# Altium PCB ESP32sample.PcbDoc
Units mil, origin at the board's own origin, x right, y up, seen from the top; angles counter-clockwise.
Board outline 1240 x 1335 mil, 4 copper layers (Top Layer, Signal2, Gnd3, Bottom Layer), stack 42.312 mil thick; 68 components, 69 nets, 286 pads, 9 vias.
Unrouted connection lines stored in the file: 175.
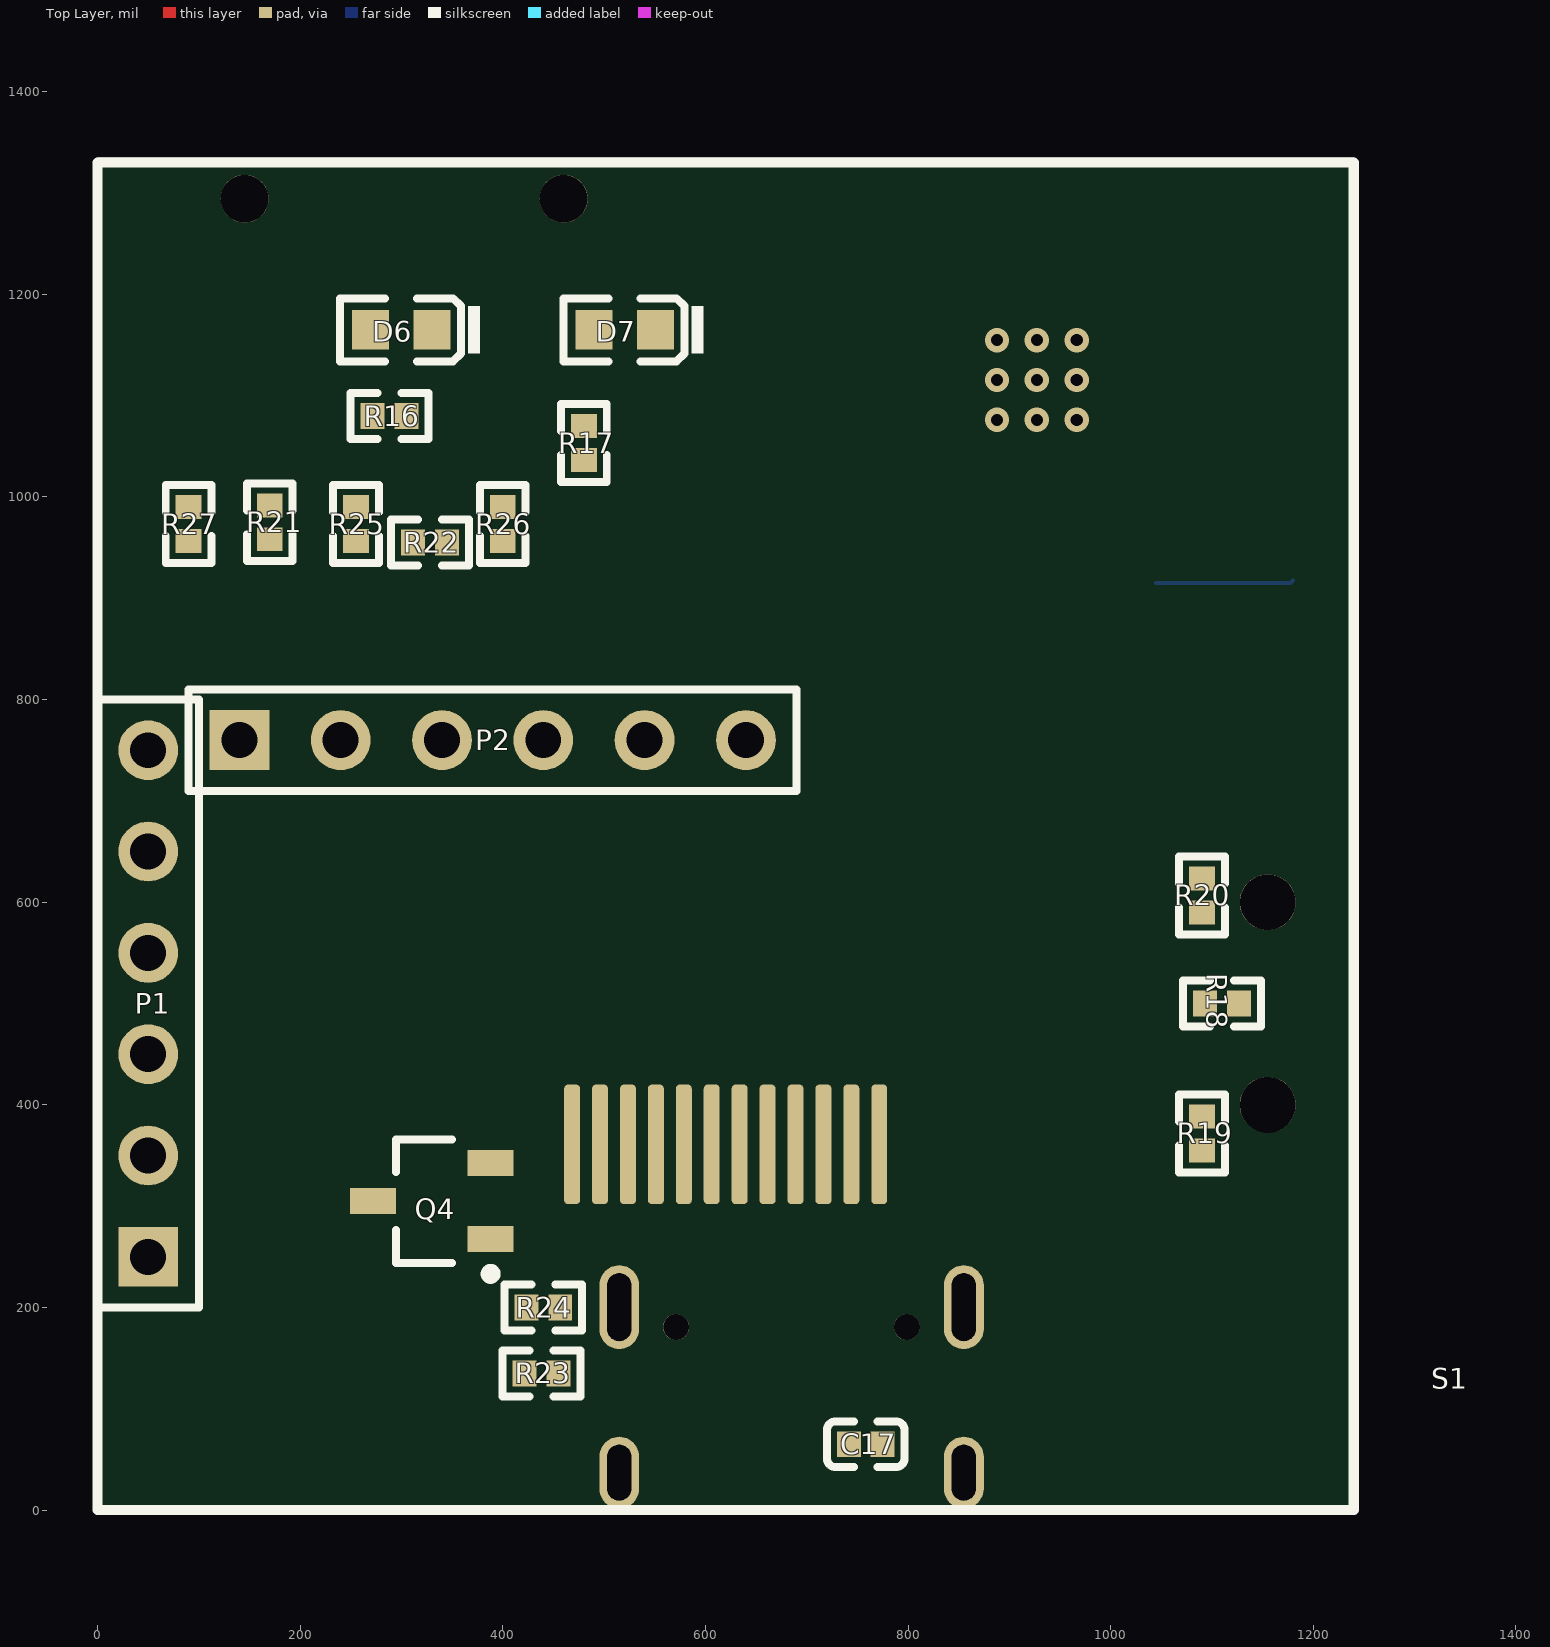
[diagram p0: Top Layer view]
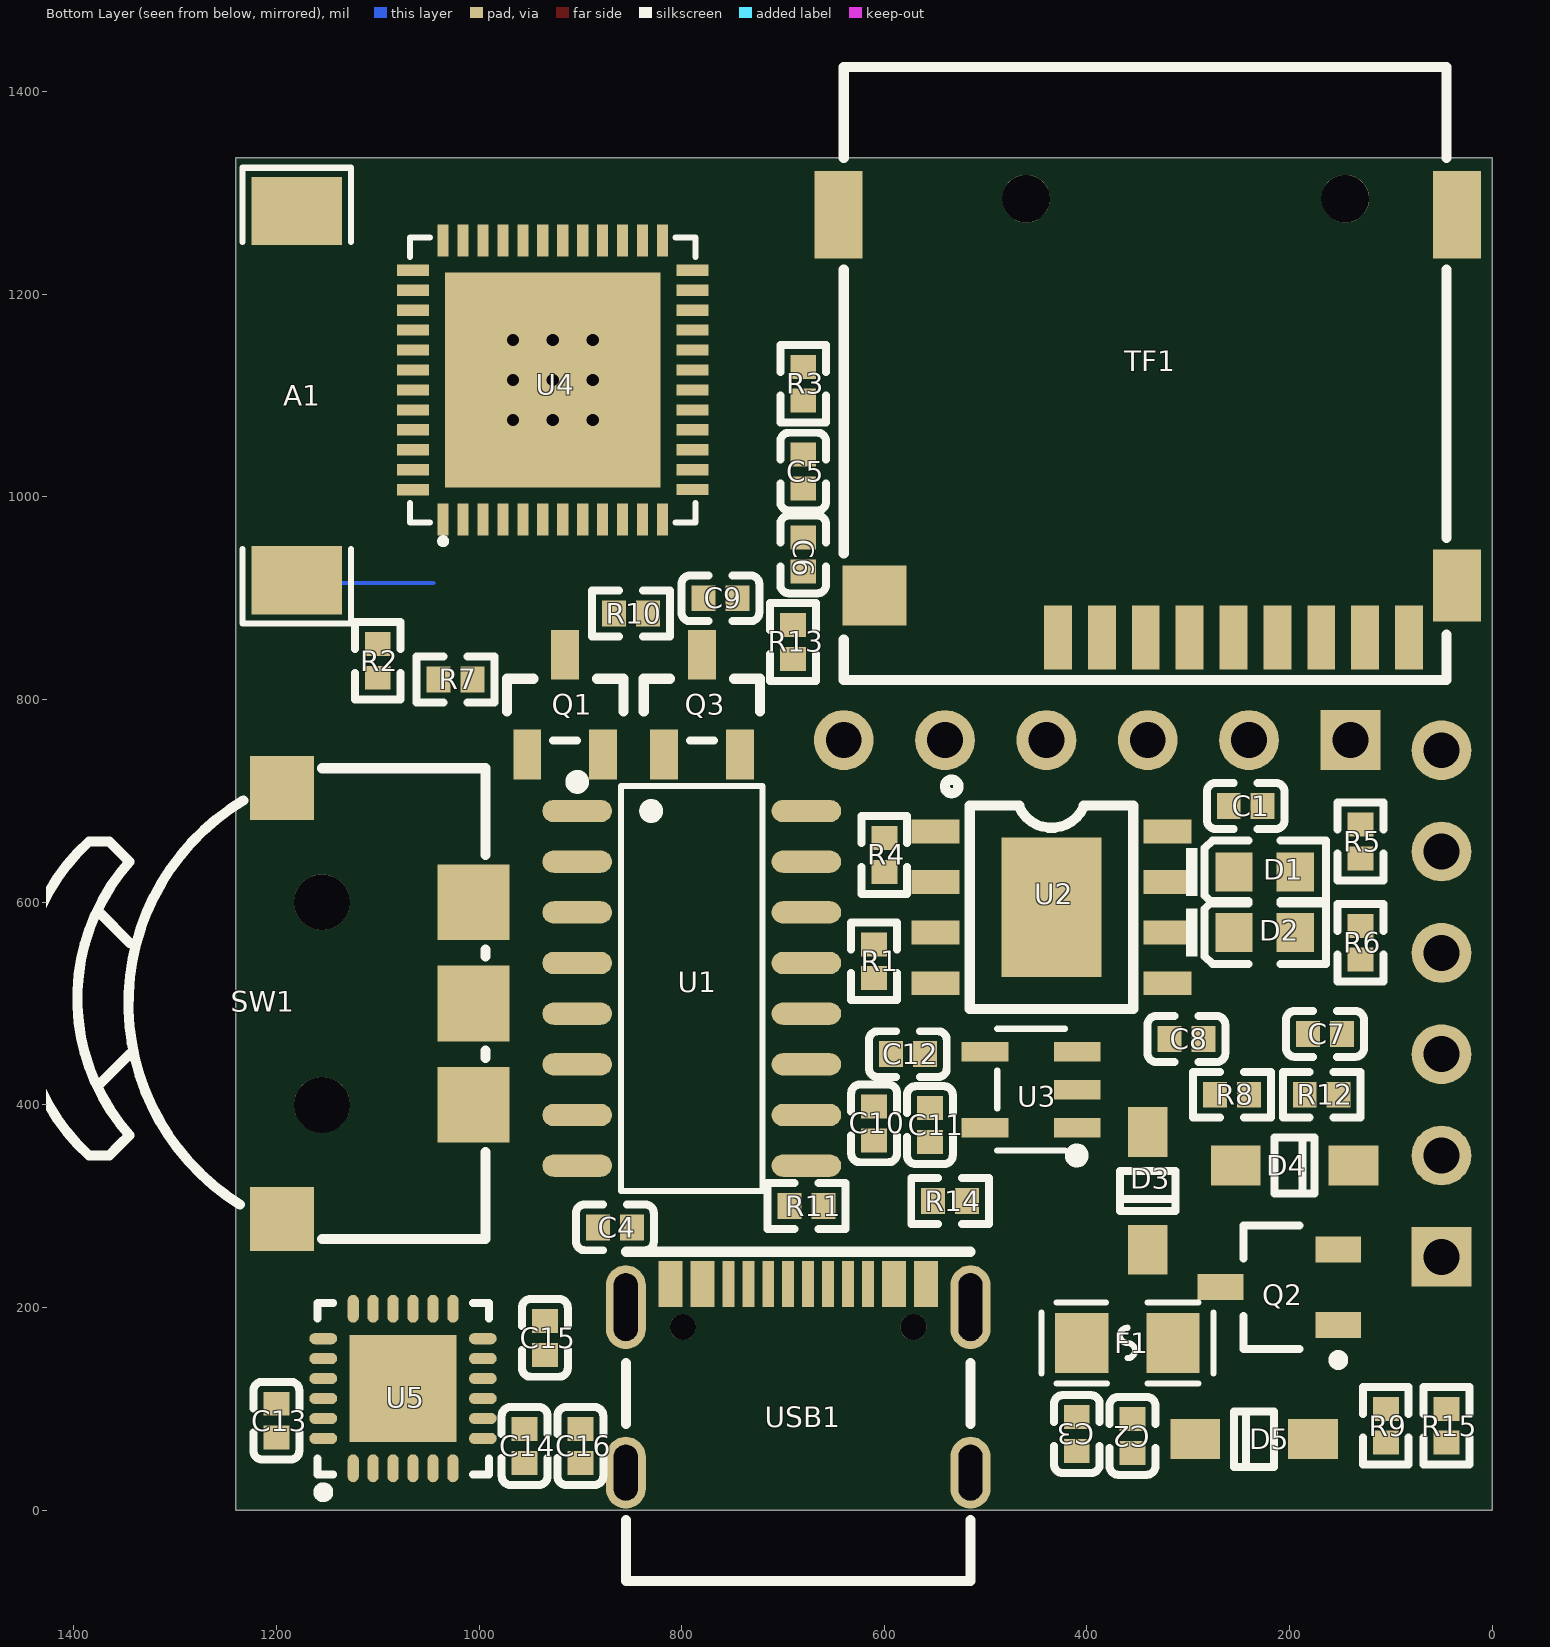
[diagram p1: Bottom Layer view, seen from below]

## Layer stack, top to bottom
Top Solder: solder mask 0.4, Solder Resist, Dk 3.5
Top Layer: signal copper 1.4
Dielectric 2: prepreg 12.252, PP-006, Dk 4.1
Signal2: signal copper 1.378
Dielectric 1: dielectric 12.252, FR-4, Dk 4.2
Gnd3: signal copper 1.378
Dielectric 3: prepreg 12.252, PP-006, Dk 4.1
Bottom Layer: signal copper 1.4
Bottom Solder: solder mask 0.4, Solder Resist, Dk 3.5

## Board outline
0,0 1240,0 1240,1335 0,1335

## Design rules (kind name [scope] priority, off if disabled: settings)
Clearance [All] p1: gap=4 ignorepadtopadclearanceinfootprint=FALSE
ComponentClearance [All] p1: gap=0 collisioncheckmode=3 verticalgap=0 showdistances=FALSE
DiffPairsRouting [All] p1: maxlimit=9 minlimit=9 mostfreqgap=9 toplayer_minwidth=4 toplayer_maxwidth=4 toplayer_prefwidth=4 midlayer1_minwidth=4 midlayer1_maxwidth=4 midlayer1_prefwidth=4 midlayer2_minwidth=4 midlayer2_maxwidth=4 midlayer2_prefwidth=4 bottomlayer_minwidth=4 bottomlayer_maxwidth=4 bottomlayer_prefwidth=4 maxuncoupledlength=500
FanoutControl Fanout_BGA [All] p1: bgadir=Out bgaviamode=Centered fanoutstyle=Auto fanoutdirection=Alternating viagrid=1 // Fanout_BGA (Default Rule)
HoleSize [All] p1: absolutevalues=TRUE maxlimit=10000 minlimit=8 maxpercent=80.000 minpercent=20.000
MinimumSolderMaskSliver [All] p1 off: minsoldermaskwidth=2
PlaneClearance [All] p1: clearance=8
PlaneConnect [All] p1: planeconnectstyle=Direct reliefexpansion=20 reliefentries=4 reliefconductorwidth=10 reliefairgap=10
PolygonConnect [All] p1: connectstyle=Direct reliefconductorwidth=10 reliefentries=4 polygonreliefangle="90 Angle" airgapwidth=10
RoutingVias [All] p1: holewidth=8 width=16 viastyle="Through Hole" minholewidth=6 minwidth=12 maxholewidth=28 maxwidth=50
SilkToSilkClearance [All] p1: silktosilkclearance=0
SilkToSolderMaskClearance [IsPad] p1: minsilkscreentomaskgap=0 clearancetoexposedcopper=TRUE
SolderMaskExpansion [All] p1: expansion=3 istentingtop=FALSE
Width [All] p1: maxlimit=10000 minlimit=4 preferedwidth=4
21 further rules are at their usual default settings.

## Components (designator, comment, footprint, x,y, rotation, side; value= is the part's Value field where it differs from the comment)
A1 "AN9520-245" ANT-SMD_L9.5-W2.1 1180,1100 r270 bottom
C1 "10uF (106) 20% 6.3V" 0402_C 243.27,695 r180 bottom
C2 "10uF (106) 20% 6.3V" 0402_C 355,73.27 r90 bottom
C3 "100nF (104) 10% 16V" 0402_C 410,75 r90 bottom
C4 "100nF (104) 10% 16V" 0402_C 865.85,279.12 r180 bottom
C5 "10uF (106) 20% 6.3V" 0402_C 680,1025 r90 bottom
C6 "100nF (104) 10% 16V" 0402_C 680,943.27 r270 bottom
C7 "10uF (106) 20% 6.3V" 0402_C 165,470 r180 bottom
C8 "10uF (106) 20% 6.3V" 0402_C 301.73,465 r180 bottom
C9 "1.0uF (105) 10% 25V" 0402_C 761.73,900 r0 bottom
C10 "100nF (104) 10% 16V" 0402_C 610,381.73 r270 bottom
C11 "10uF (106) 20% 6.3V" 0402_C 555,380 r270 bottom
C12 "10nF (103) 10% 50V" 0402_C 576.73,450 r180 bottom
C13 "2.2nF (222) 10% 50V" 0402_C 1200,88.27 r270 bottom
C14 "2.2nF (222) 10% 50V" 0402_C 955,63.27 r90 bottom
C15 "100nF (104) 10% 16V" 0402_C 935,170 r270 bottom
C16 "10nF (103) 10% 50V" 0402_C 900,63.27 r90 bottom
C17 "100nF (104) 10% 16V" 0402_C 758.27,65 r180 top
D1 "红灯 0603" 0603_LED_S1 224.69,630 r180 bottom
D2 "绿灯 0603" 0603_LED_S1 224.69,570 r180 bottom
D3 "1N5819W" SOD-123 340,315 r90 bottom
D4 "1N5819W" SOD-123 195,340 r0 bottom
D5 "1N5819W" SOD-123 235,70 r180 bottom
D6 "白灯 0603" 0603_LED_S1 299.69,1165 r180 top
D7 "白灯 0603" 0603_LED_S1 520.32,1165 r180 top
F1 "ASMD0805-050" ASMD0805 360,165 r180 bottom
P1 "Header 6" HDR1X6 50,250 r90 top
P2 "Header 6" HDR1X6 140,760 r0 top
Q1 "SS8050 Y1" SOT-23(SOT-23-3) 915,795 r270 bottom
Q2 "AO3401A P道沟 X13A15 SOT-23" SOT-23-3L 210,220 r180 bottom
Q3 "SS8050 Y1" SOT-23(SOT-23-3) 780,795 r270 bottom
Q4 "AO3400A N道沟 X0YV1T SOT-23" SOT-23-3L 330,305 r0 top
R1 "1Ω (1R00) ±1%" 0402_R 610,541.73 r270 bottom
R2 "200Ω (2000) ±1%" 0402_R 1100,838.27 r270 bottom
R3 "0Ω (0R0) ±1%" 0402_R 680,1111.73 r90 bottom
R4 "1.2KΩ (1201) ±1%" 0402_R 600,646.73 r270 bottom
R5 "1KΩ (1001) ±1%" 0402_R 130,660 r270 bottom
R6 "1KΩ (1001) ±1%" 0402_R 130,560 r90 bottom
R7 "12KΩ (1202) ±1%" 0402_R 1023.27,820 r180 bottom
R8 "100KΩ (1003) ±1%" 0402_R 256.73,410 r180 bottom
R9 "1KΩ (1001) ±1%" 0402_R 105,83.27 r270 bottom
R10 "10KΩ (1002) ±1%" 0402_R 850,885 r180 bottom
R11 "5.1KΩ (5101) ±1%" 0402_R 676.73,300 r180 bottom
R12 "100KΩ (1003) ±1%" 0402_R 168.27,410 r0 bottom
R13 "12KΩ (1202) ±1%" 0402_R 690,856.73 r90 bottom
R14 "5.1KΩ (5101) ±1%" 0402_R 535,305 r0 bottom
R15 "100KΩ (1003) ±1%" 0402_R 45,83.27 r90 bottom
R16 "1KΩ (1001) ±1%" 0402_R 288.27,1080 r180 top
R17 "1KΩ (1001) ±1%" 0402_R 480,1053.27 r90 top
R18 "10KΩ (1002) ±1%" 0402_R 1110,500 r0 top
R19 "10KΩ (1002) ±1%" 0402_R 1090,371.73 r90 top
R20 "10KΩ (1002) ±1%" 0402_R 1090,606.73 r90 top
R21 "10KΩ (1002) ±1%" 0402_R 170,975 r90 top
R22 "10KΩ (1002) ±1%" 0402_R 328.27,955 r180 top
R23 "10Ω (10R0) ±1%" 0402_R 438.27,135 r0 top
R24 "10KΩ (1002) ±1%" 0402_R 440,200 r180 top
R25 "10KΩ (1002) ±1%" 0402_R 255,973.27 r90 top
R26 "10KΩ (1002) ±1%" 0402_R 400,973.27 r90 top
R27 "10KΩ (1002) ±1%" 0402_R 90,973.27 r90 top
S1 "LCD-240x240" LCD-240x240-FlUSH-154 620,670 r0 top locked
SW1 "K1-1502SA-02" KEY-SMD_K1-1502SA-02 1099.88,500 r90 bottom
TF1 "TF" TF-SMD_THD2528 340,1070 r0 bottom
U1 "CH340" SOP-16_L10.0 790,515 r270 bottom
U2 "TP4056_C725790" ESOP-8_TP4056 435,595 r270 bottom
U3 "LP2992 3V3" SOT-23-5_L3.0-W1.7-P0.95-LS2.8-BL 455,415 r90 bottom
U4 "ESP32_SIP" QFN-48_7X7 927.2,1115.47 r180 bottom
U5 "MPU-6050" QFN-24_4x4x05P 1075,120 r180 bottom
USB1 "TYPE-C16PIN" TYPE-C-SMD 685,130 r180 bottom

## Footprints (in the part's own frame and the unit in brackets; to place one, negate y for a bottom-side part, rotate by r counter-clockwise, add the part's x,y. Pads: shape width x height; smd on the part's side, far side on the other; paste and mask are expansions set on the pad)
0402_C [mm]
  rect 0.6x0.65 smd mask+0.051: 1(-0.425,0) 2(0.425,0)
  silkscreen extent -0.97,-0.58 0.97,0.58, body extent -0.48,-0.3 0.52,0.3, height 0.2
0402_R [mm]
  rect 0.6x0.65 smd mask+0.051: 1(-0.425,0) 2(0.425,0)
  silkscreen extent -0.97,-0.58 0.97,0.58, body extent -0.57,-0.27 0.58,0.28, height 0.41
0603_LED_S1 [mm]
  rect 0.93x0.98 smd: A(0.77,0) K(-0.77,0)
  silkscreen extent -1.97,-0.79 1.54,0.79, body extent -0.8,-0.4 0.8,0.4, height 0.6
ANT-SMD_L9.5-W2.1 [mm] "陶瓷天线pcb"
  rect 1.71x2.268 smd: 1(-4.63,0) 2(4.63,0)
  silkscreen extent -5.71,-1.36 5.71,1.36, body extent -4.75,-1.05 4.75,1.05
ASMD0805 [mm]
  rect 1.335x1.5 smd: 1(-1.142,0) 2(1.142,0)
  silkscreen extent -2.16,-1.02 2.16,1.02, body extent -1.03,-0.69 1.07,0.71, height 0.83
ESOP-8_TP4056 [mm]
  rect 0.6x1.2 smd: 1(-1.905,-2.908) 2(-0.635,-2.908) 3(0.635,-2.908) 4(1.905,-2.908) 5(1.905,2.908) 6(0.635,2.908) 7(-0.635,2.908) 8(-1.905,2.908)
  rect 3.5x2.5 smd: 9(0,0)
  silkscreen extent -3.2,-2.67 2.55,2.05, body extent -2.48,-2.96 2.52,3.24, height 1.76
HDR1X6 [mm] "Connector; Header; 6 Position"
  rect 1.5x1.5 hole 0.9: 1(0,0)
  round 1.5 hole 0.9: 2(2.54,0) 3(5.08,0) 4(7.62,0) 5(10.16,0) 6(12.7,0)
  silkscreen extent -1.27,-1.27 13.97,1.27
KEY-SMD_K1-1502SA-02 [mm]
  rect 1.9x1.8 smd: 1(-2.54,-2.4) 2(2.54,-2.4) T(0,-2.4)
  rect 1.6x1.6 smd: 3(-5.4,2.4) C(5.4,2.4)
  round 1.4 hole 1.4 unplated: ""(-2.54,1.4) ""(2.54,1.4)
  silkscreen extent -5.9,-2.7 5.9,8.97, body extent -7.21,-2.88 7.29,9.56, height 2.54
LCD-240x240-FlUSH-154 [mm]
  rrect50% 0.4x3 smd: 1(3.851,-7.85) 2(3.151,-7.85) 3(2.451,-7.85) 4(1.751,-7.85) 5(1.051,-7.85) 6(0.351,-7.85) 7(-0.349,-7.85) 8(-1.049,-7.85) 9(-1.749,-7.85) 10(-2.449,-7.85) 11(-3.149,-7.85) 12(-3.849,-7.85)
  silkscreen extent -15.75,-17.02 15.75,16.76, body extent -15.7,-17.02 15.7,16.76
QFN-24_4x4x05P [mm]
  rect 2.68x2.68 smd mask+0.051: 0(0,0)
  oval 0.28x0.7 smd mask+0.051: 1(-1.25,-2) 2(-0.75,-2) 3(-0.25,-2) 4(0.25,-2) 5(0.75,-2) 6(1.25,-2) 13(1.25,2) 14(0.75,2) 15(0.25,2) 16(-0.25,2) 17(-0.75,2) 18(-1.25,2)
  oval 0.7x0.28 smd mask+0.051: 7(2,-1.25) 8(2,-0.75) 9(2,-0.25) 10(2,0.25) 11(2,0.75) 12(2,1.25) 19(-2,1.25) 20(-2,0.75) 21(-2,0.25) 22(-2,-0.25) 23(-2,-0.75) 24(-2,-1.25)
  silkscreen extent -2.15,-2.72 2.15,2.15
QFN-48_7X7 [mm]
  rect 0.28x0.8 smd: 1(-2.75,-3.5) 2(-2.25,-3.5) 3(-1.75,-3.5) 4(-1.25,-3.5) 5(-0.75,-3.5) 6(-0.25,-3.5) 7(0.25,-3.5) 8(0.75,-3.5) 9(1.25,-3.5) 10(1.75,-3.5) 11(2.25,-3.5) 12(2.75,-3.5) 25(2.75,3.5) 26(2.25,3.5) 27(1.75,3.5) 28(1.25,3.5) 29(0.75,3.5) 30(0.25,3.5) 31(-0.25,3.5) 32(-0.75,3.5) 33(-1.25,3.5) 34(-1.75,3.5) 35(-2.25,3.5) 36(-2.75,3.5)
  rect 0.8x0.28 smd: 13(3.5,-2.75) 14(3.5,-2.25) 15(3.5,-1.75) 16(3.5,-1.25) 17(3.5,-0.75) 18(3.5,-0.25) 19(3.5,0.25) 20(3.5,0.75) 21(3.5,1.25) 22(3.5,1.75) 23(3.5,2.25) 24(3.5,2.75) 37(-3.5,2.75) 38(-3.5,2.25) 39(-3.5,1.75) 40(-3.5,1.25) 41(-3.5,0.75) 42(-3.5,0.25) 43(-3.5,-0.25) 44(-3.5,-0.75) 45(-3.5,-1.25) 46(-3.5,-1.75) 47(-3.5,-2.25) 48(-3.5,-2.75)
  rect 5.4x5.4 smd: 49(0,0)
  silkscreen extent -3.58,-4.11 3.58,3.58, body extent -3.47,-3.5 3.53,3.5, height 0.91
SOD-123 [mm]
  rect 1.25x1 smd: 1(1.475,0) 2(-1.475,0)
  silkscreen extent -0.5,-0.7 0.5,0.7, body extent -1.85,-0.77 1.85,0.78, height 1.35
SOP-16_L10.0 [mil]
  oval 22x68.7 smd mask+2: 1(-175,-113.1) 2(-125,-113.1) 3(-75,-113.1) 4(-25,-113.1) 5(25,-113.1) 6(75,-113.1) 7(125,-113.1) 8(175,-113.1) 9(175,113.1) 10(125,113.1) 11(75,113.1) 12(25,113.1) 13(-25,113.1) 14(-75,113.1) 15(-125,113.1) 16(-175,113.1)
  silkscreen extent -210,-119 200,70, body extent -196,-124 198,117, height 69
SOT-23(SOT-23-3) [mm]
  rect 1.25x0.7 smd: 1(1.25,-0.95) 2(1.25,0.95) 3(-1.25,0)
  silkscreen extent -0.65,-1.46 0.9,1.46, body extent -1.5,-1.5 1.5,1.5, height 1.3
SOT-23-3L [mm] "http://www.aosmd.com/res/packaging_information/SOT-23-3L.pdf"
  rect 1.15x0.65 smd: 1(1.475,-0.95) 2(1.475,0.95) 3(-1.475,0)
  silkscreen extent -0.9,-1.95 1.6,1.55, body extent -0.9,-1.55 0.9,1.55, height 1.25
SOT-23-5_L3.0-W1.7-P0.95-LS2.8-BL [mm]
  rect 0.49x1.157 smd: 1(-0.95,-1.154) 2(0,-1.154) 3(0.95,-1.154)
  rect 0.49x1.175 smd: 4(0.95,1.154) 5(-0.95,1.154)
  silkscreen extent -1.8,-1.29 1.53,0.85
TF-SMD_THD2528 [mm]
  rect 0.7x1.6 smd: 1(2.25,5.3) 2(1.15,5.3) 3(0.05,5.3) 4(-1.05,5.3) 5(-2.15,5.3) 6(-3.25,5.3) 7(-4.35,5.3) 8(-5.45,5.3) 9(-6.55,5.3)
  rect 1.2x1.8 smd: 10(-7.75,4)
  rect 1.2x2.2 smd: 11(-7.75,-5.3) 12(7.75,-5.3)
  rect 1.6x1.5 smd: 13(6.85,4.25)
  round 1.2 hole 1.2 unplated: ""(-4.95,-5.7) ""(3.05,-5.7)
  silkscreen extent -7.49,-9 7.62,6.36, body extent -8.15,-9.77 8,5.43, height 2.04
TYPE-C-SMD [mm]
  oval 1x2.1 hole 0.6 slot 1.7 at 90 deg: 1(-4.32,1.787) 2(4.32,1.787)
  oval 1x1.8 hole 0.6 slot 1.4 at 90 deg: 3(-4.32,-2.362) 4(4.32,-2.362)
  rect 0.6x1.15 smd: A1B12(-3.2,2.362) A4B9(-2.4,2.362) B1A12(3.2,2.362) B4A9(2.4,2.362)
  rect 0.3x1.15 smd: A5(-1.25,2.362) A6(-0.25,2.362) A7(0.25,2.362) A8(-1.75,2.362) B5(1.75,2.362) B6(0.75,2.362) B7(-0.75,2.362) B8(1.25,2.362)
  round 0.65 hole 0.65 unplated: ""(-2.89,1.288) ""(2.89,1.288)
  silkscreen extent -4.32,-5.08 4.32,3.17, body extent -4.7,-5.22 4.24,2.68, height 1.61

## Part data
A1: "陶瓷wifi/bt天线", BOM_JLCPCB Part Class="Extended Part", BOM_Manufacturer=Rainsun, BOM_Manufacturer Part=AN9520-245, BOM_Supplier=LCSC, BOM_Supplier Part=C99665, spicePre=L, spiceSymbolName=AN9520-245
C1 C2 C5 C7 C8 C11: library part "0402 10uF (106) 20% 6.3V", "贴片电容", Package=0402, SuppliersPartNumber=C15525, ComponentLink1Description=供应商链接, ComponentLink1URL=http://www.szlcsc.com/product/details_16204.html, Supplier=LC
C3 C4 C6 C10 C15 C17: library part "0402 100nF (104) 10% 16V", "贴片电容", Package=0402, SuppliersPartNumber=C1525, ComponentLink1Description=供应商链接, ComponentLink1URL=http://www.szlcsc.com/product/details_1877.html, Supplier=LC
C9: library part "0402 1.0uF (105) 10% 25V", "贴片电容", Package=0402, SuppliersPartNumber=C52923, ComponentLink1Description=供应商链接, ComponentLink1URL=http://www.szlcsc.com/product/details_53938.html, Supplier=LC
C12 C16: library part "0402 10nF (103) 10% 50V", "贴片电容", Package=0402, SuppliersPartNumber=C15195, ComponentLink1Description=供应商链接, ComponentLink1URL=http://www.szlcsc.com/product/details_15869.html, Supplier=LC
C13 C14: library part "0402 2.2nF (222) 10% 50V", "贴片电容", Package=0402, SuppliersPartNumber=C1531, ComponentLink1Description=供应商链接, ComponentLink1URL=http://www.szlcsc.com/product/details_1883.html, Supplier=LC
D1: library part "0603 红灯", "发光二极管", Package=0603, SuppliersPartNumber=C2286, ComponentLink1Description=供应商链接, ComponentLink1URL=http://www.szlcsc.com/product/details_2659.html, Supplier=LC
D2: library part "0603 绿灯", "发光二极管", Package=0603, SuppliersPartNumber=C72043, ComponentLink1Description=供应商链接, ComponentLink1URL=http://www.szlcsc.com/product/details_73152.html, Supplier=LC
D3 D4 D5: "二极管", Average Rectified Current (Io)=1A, Forward Voltage (Vf@If)=900mV@3A, JLCPCB Part Class="Extended Part", LCSC Part Name="40V 1A 900mV@3A", Manufacturer=TWGMC(台湾迪嘉), Reverse Leakage Current (Ir)=1mA@40V, Reverse Voltage (Vr)=40V, Add into BOM=yes, Convert to PCB=yes, Datasheet=https://atta.szlcsc.com/upload/public/pdf/source/20200828/C727113_260B72EC53C389C21DF1E8AB243F1BFC.pdf, Device=1N5819W_C727115, Diode Configuration=独立式, Manufacturer Part=1N5819W, Supplier=LCSC, Supplier Footprint=SOD-123, Supplier Part=C727115, Symbol=1N5819W_C727115
D6 D7: library part "0603 白灯", "发光二极管", Package=0603, SuppliersPartNumber=C2290, ComponentLink1Description=供应商链接, ComponentLink1URL=http://www.szlcsc.com/product/details_2663.html, Supplier=LC
F1: BOM_JLCPCB Part Class="Extended Part", BOM_Manufacturer=JDTFUSE, BOM_Manufacturer Part=ASMD0805-050, BOM_Supplier=LCSC, BOM_Supplier Part=C135329, Contributor=LCSC, spicePre=F, spiceSymbolName=ASMD0805-050
P1 P2: "Header, 6-Pin", LatestRevisionDate=17-Jul-2002, LatestRevisionNote="Re-released for DXP Platform.", Publisher="Altium Limited"
Q1 Q3: library part "SOT-23 SS8050 Y1", "三极管", Package=SOT-23, SuppliersPartNumber=C2150, ComponentLink1Description=供应商链接, ComponentLink1URL=http://www.szlcsc.com/product/details_2507.html, Supplier=LC
Q2: "MOS(场效应管)", Package=SOT-23, SuppliersPartNumber=C15127, ComponentLink1Description=供应商链接, ComponentLink1URL=http://www.szlcsc.com/product/details_15801.html, Supplier=LC
Q4: "MOS(场效应管)", Package=SOT-23, SuppliersPartNumber=C20917, ComponentLink1Description=供应商链接, ComponentLink1URL=http://www.szlcsc.com/product/details_21629.html, Supplier=LC
R1: library part "0402 1Ω (1R00) 1%", "贴片电阻", Package=0402, SuppliersPartNumber=C25086, ComponentLink1Description=供应商链接, ComponentLink1URL=http://www.szlcsc.com/product/details_25829.html, Supplier=LC
R2: library part "0402 200Ω (2000) 1%", "贴片电阻", Package=0402, SuppliersPartNumber=C25087, ComponentLink1Description=供应商链接, ComponentLink1URL=http://www.szlcsc.com/product/details_25830.html, Supplier=LC
R3: library part "0402 0Ω (0R0) 1%", "贴片电阻", Package=0402, SuppliersPartNumber=C17168, ComponentLink1Description=供应商链接, ComponentLink1URL=http://www.szlcsc.com/product/details_17853.html, Supplier=LC
R4: library part "0402 1.2KΩ (1201) 1%", "贴片电阻", Package=0402, SuppliersPartNumber=C25862, ComponentLink1Description=供应商链接, ComponentLink1URL=http://www.szlcsc.com/product/details_26605.html, Supplier=LC
R5 R6 R9 R16 R17: library part "0402 1KΩ (1001) 1%", "贴片电阻", Package=0402, SuppliersPartNumber=C11702, ComponentLink1Description=供应商链接, ComponentLink1URL=http://www.szlcsc.com/product/details_12256.html, Supplier=LC
R7 R13: library part "0402 12KΩ (1202) 1%", "贴片电阻", Package=0402, SuppliersPartNumber=C25752, ComponentLink1Description=供应商链接, ComponentLink1URL=http://www.szlcsc.com/product/details_26495.html, Supplier=LC
R8 R12 R15: library part "0402 100KΩ (1003) 1%", "贴片电阻", Package=0402, SuppliersPartNumber=C25741, ComponentLink1Description=供应商链接, ComponentLink1URL=http://www.szlcsc.com/product/details_26484.html, Supplier=LC
R10 R18 R19 R20 R21 R22 R24 R25 R26 R27: library part "0402 10KΩ (1002) 1%", "贴片电阻", Package=0402, SuppliersPartNumber=C25744, ComponentLink1Description=供应商链接, ComponentLink1URL=http://www.szlcsc.com/product/details_26487.html, Supplier=LC
R11 R14: library part "0402 5.1KΩ (5101) 1%", "贴片电阻", Package=0402, SuppliersPartNumber=C25905, ComponentLink1Description=供应商链接, ComponentLink1URL=http://www.szlcsc.com/product/details_26648.html, Supplier=LC
R23: library part "0402 10Ω (10R0) 1%", "贴片电阻", Package=0402, SuppliersPartNumber=C25077, ComponentLink1Description=供应商链接, ComponentLink1URL=http://www.szlcsc.com/product/details_25820.html, Supplier=LC
S1: "显示屏"
SW1: "拨码开关", BOM_JLCPCB Part Class="Extended Part", BOM_Manufacturer="Rectangular Connectors - Contacts", BOM_Manufacturer Part=K1-1502SA-02, BOM_Supplier=LCSC, BOM_Supplier Part=C128929, Contributor=LCSC, spicePre=S, spiceSymbolName=K1-1502SA-02
TF1: library part TF卡座, "8脚自弹"
U1: "USB to serial", Package=SOIC-16_150mil, SuppliersPartNumber=C14267, ComponentLink1Description=供应商链接, ComponentLink1URL=http://www.szlcsc.com/product/details_14927.html, Supplier=LC
U2: library part TP4056, BOM_JLCPCB Part Class="Extended Part", BOM_Manufacturer="UMW(Youtai Semiconductor Co., Ltd.)", BOM_Manufacturer Part=TP4056, BOM_Supplier=LCSC, BOM_Supplier Part=C725790, Contributor=LCSC, spicePre=U, spiceSymbolName=TP4056_C725790
U3: library part LP2992, "LDO"
U4: library part ESP32-PICO
U5: library part MPU-6050_[C24112], "传感器", Package=QFN-24_4x4x05P, SuppliersPartNumber=C24112, ComponentLink1Description=供应商链接, ComponentLink1URL=http://www.szlcsc.com/product/details_24852.html, Supplier=LC
USB1: Current Rating - Power (Max)=3A, JLCPCB Part Class="Extended Part", LCSC Part Name="Type-C 母座 卧贴 快充闪充 停产", Manufacturer="SHOU HAN(首韩)", Operating Temperature Range=-40~+85, Add into BOM=yes, Connector Type=Type-C, Convert to PCB=yes, Datasheet=https://atta.szlcsc.com/upload/public/pdf/source/20190521/C393939_7B9043D4CF1026AF443AB60D91FBCD5C.pdf, Device=TYPE-C16PIN, Gender=母座, Manufacturer Part=TYPE-C16PIN, Mounting Style=卧贴, Number of Contacts=16, Number of Ports=1, Standard=-, Supplier=LCSC, Supplier Footprint=SMD, Supplier Part=C393939, Symbol=TYPE-C16PIN

## Via types
v1: diameter 24.02, hole 12, Top Layer to Bottom Layer, 9 vias

## Nets (pads, with @x,y where several pads share a name; then routed paths per layer and width w, separated by ;. In a path a pad name is that pad's centre, name@x,y a point inside that pad or via, vN(x,y) a via of type N, cw(c..) or ccw(c..) an arc to the next point about the centre after c; other vN are vias at no path point)
3V3: C10.2 C11.2 C14.2 C16.2 R3.2 R16.1 U3.5 U5.8 U5.13
3V3A: C5.2 C6.2 P2.1 R3.1 R10.2 R17.1 R18.2 R19.1 R20.2 R21.2 R22.2 R25.2 R26.2 R27.2 TF1.4 U4.1 U4.3 U4.4 U4.19 U4.37 U4.43 U4.46
5VD: C2.2 C3.2 D3.2 D5.2 F1.2 R1.1 U1.16
BAT_DET: C8.2 R8.1 R12.2 U4.6
BOOT: Q3.3 U4.23
CH340_Rx: U1.3 U4.41
CH340_Tx: R2.1 U4.40
DTR: Q3.2 R7.2 U1.12
EC_A: R20.1 SW1.2 U4.42
EC_B: R19.2 SW1.1 U4.38
EC_KEY: R18.1 SW1.T U4.34
ESP_EN: C9.2 Q1.3 R10.1 U4.9
FLASH_CLK: U4.31
FLASH_CS: U4.25
FLASH_SD0: U4.27
FLASH_SD1: U4.33
FLASH_SD2: U4.30
FLASH_SD3: U4.32
GND: C1.2 C2.1 C3.1 C4.2 C5.1 C6.1 C7.1 C8.1 C9.1 C10.1 C11.1 C12.1 C13.2 C14.1 C15.1 C16.1 C17.1 D6.K P1.2 P2.2 P2.3 Q4.2 R4.1 R11.1 R12.1 R14.1 R15.1 R24.1 S1.1 S1.5 S1.6 S1.8 SW1.3 SW1.C TF1.6 TF1.10 U1.1 U2.1 U2.3 U3.2 U4.49 U5.1 U5.9 U5.11 U5.18 USB1.1 USB1.2 USB1.3 USB1.4 USB1.A1B12 USB1.B1A12
  other v1: 887.83,1076.09 927.2,1076.09 966.57,1076.09 887.83,1115.47 927.2,1115.47 966.57,1115.47 887.82,1154.84 927.2,1154.84 966.56,1154.84
GPIO2: S1.7 U4.22
GPIO4: S1.11 U4.24
GPIO9: P2.6 U4.28
GPIO10: P2.5 U4.29
GPIO12: Q4.1 R24.2 U4.18
GPIO13: R22.1 TF1.3 U4.20
GPIO14: R25.1 TF1.5 U4.17
GPIO15: R26.1 TF1.2 U4.21
GPIO18: S1.9 U4.35
GPIO22: R27.1 TF1.9 U4.39
GPIO23: S1.10 U4.36
GPIO25: P2.4 U4.14
GPIO26: R21.1 TF1.7 U4.15
GPIO27: D7.K U4.16
GPIO32: U4.12 U5.24
GPIO33: U4.13 U5.23
GPIO34: U4.10 U5.12
GPIO35: P1.3 U4.11
GPIO38: P1.5 U4.7
LCD_LEDK: R23.2 S1.2
NetA1_2: A1.2 U4.2 | length 136.1
  Bottom Layer w4: 1045,915 1177.28,915 A1.2
NetC1_1: C1.1 R1.2 R5.2 R6.2 U2.4 U2.8
NetC4_1: C4.1 U1.4
NetC12_2: C12.2 U3.4
NetC13_1: C13.1 U5.20
NetC15_2: C15.2 U5.10
NetD1_A: D1.A R5.1
NetD1_K: D1.K U2.7
NetD2_A: D2.A R6.1
NetD2_K: D2.K U2.6
NetD5_1: D5.1 R9.2
NetD6_A: D6.A R16.2
NetD7_A: D7.A R17.2
NetQ1_1: Q1.1 R7.1
NetQ2_1: Q2.1 R9.1 R15.2
NetQ3_1: Q3.1 R13.1
NetQ4_3: Q4.3 R23.1
NetR2_2: R2.2 U1.2
NetR4_2: R4.2 U2.2
NetR11_2: R11.2 USB1.A5
NetR14_2: R14.2 USB1.B5
RTS: Q1.2 R13.2 U1.11
SENSOR_VN: P1.4 U4.8
SENSOR_VP: P1.6 U4.5
USB-DN: U1.6 USB1.A7 USB1.B7
USB-DP: U1.5 USB1.A6 USB1.B6
VBAT: D3.1 D4.1 Q2.2 R8.2 U3.1 U3.3
VBAT_IN: C7.2 D4.2 P1.1 Q2.3 U2.5
VBUS: F1.1 USB1.A4B9 USB1.B4A9
VCC_3V3: C17.2 S1.3 S1.4
pads on no net: A1.1 S1.12 SW1. TF1. TF1.1 TF1.8 TF1.11 TF1.12 TF1.13 U1.7 U1.8 U1.9 U1.10 U1.13 U1.14 U1.15 U2.9 U4.26 U4.44 U4.45 U4.47 U4.48 U5.0 U5.2 U5.3 U5.4 U5.5 U5.6 U5.7 U5.14 U5.15 U5.16 U5.17 U5.19 U5.21 U5.22 USB1. USB1.A8 USB1.B8